# Altium PCB top.PcbDoc
Units mm, origin at the board's own origin, x right, y up, seen from the top; angles counter-clockwise.
Board outline 100.5 x 70.5 mm, 2 copper layers (Top Layer, Bottom Layer); 67 components, 51 nets, 221 pads, 12 vias.
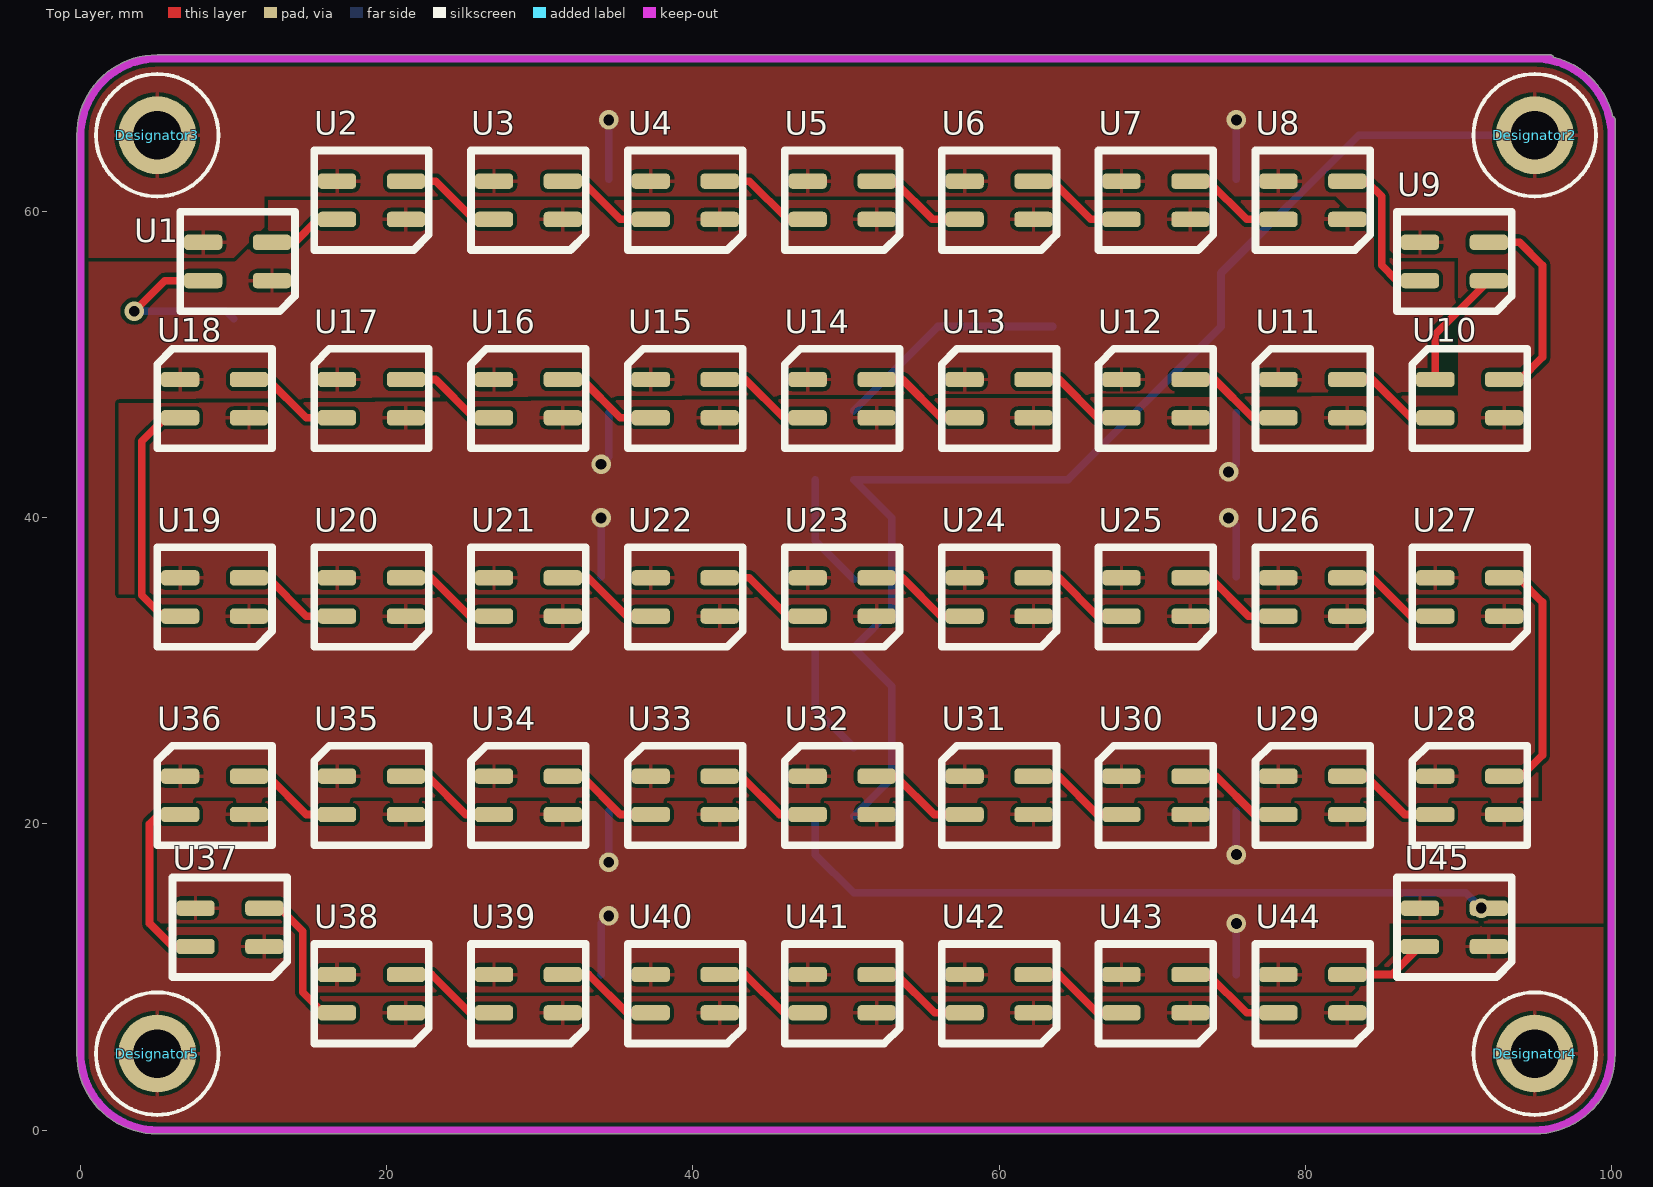
[diagram p0: Top Layer view]
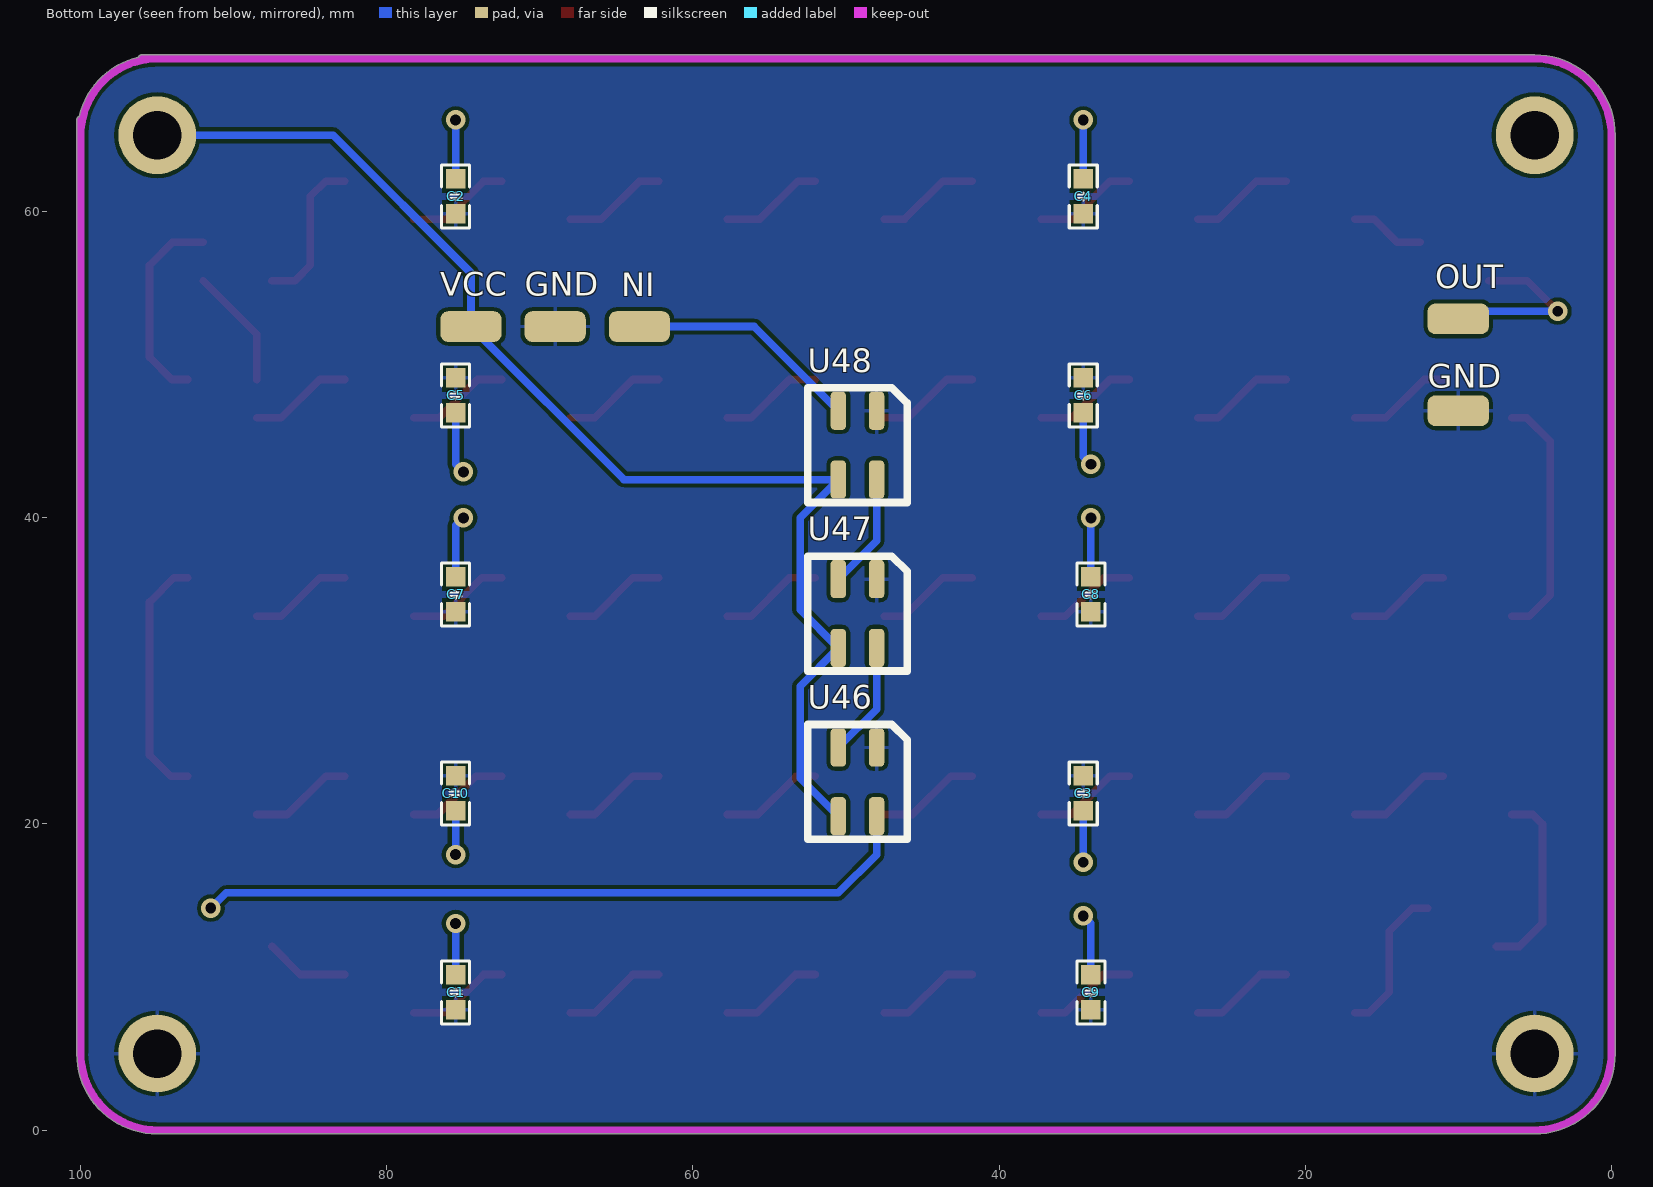
[diagram p1: Bottom Layer view, seen from below]
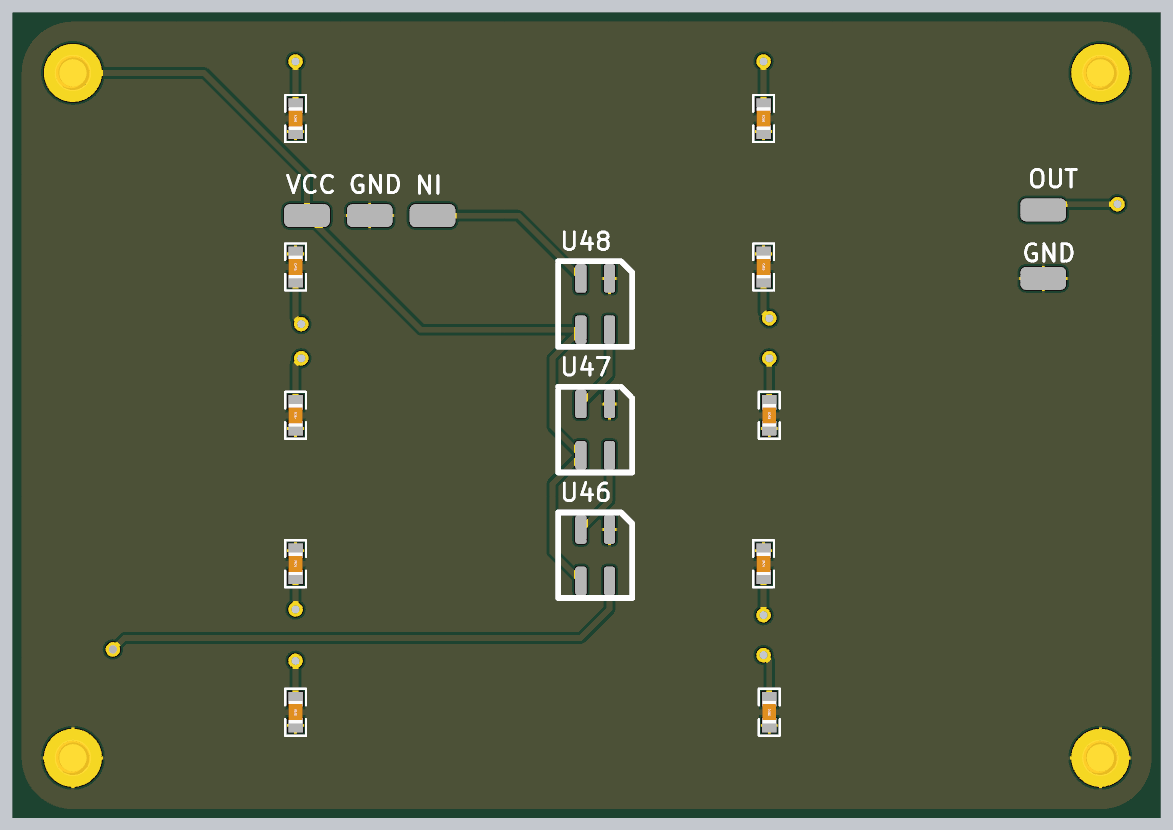
[diagram p2: 3D render of the assembled board from below, using the file's embedded part models]

## Layer stack, top to bottom
Top Solder: solder mask 0.0102, Solder Resist, Dk 3.5
Top Layer: signal copper 0.0356
Dielectric 1: dielectric 0.32, FR-4, Dk 4.8
Bottom Layer: signal copper 0.0356
Bottom Solder: solder mask 0.0102, Solder Resist, Dk 3.5

## Board outline
4.999,-0.25 cw(c5,5) -0.25,5 -0.25,65 cw(c0,65) -0.25,65.001 cw(c5,65) 5,70.25 96,70.25 cw(c96,70) 96.227,70.105 cw(c95,65) 100.105,66.227 cw(c100,66) 100.25,66 100.25,5 cw(c100,5) 100.25,4.999 ccw(c95,5) 100.25,5 100.25,4.999 cw(c95,5) 95,-0.25 5,-0.25 cw(c5,0)

## Design rules (kind name [scope] priority, off if disabled: settings)
Clearance [All] p1: gap=0.254 ignorepadtopadclearanceinfootprint=FALSE except(0: Arc-Hole Track-Hole SMDPad-Hole THPad-Hole Via-Hole Fill-Hole Poly-Hole Region-Hole Text-Hole)
PolygonConnect [All] p1: connectstyle=Relief reliefconductorwidth=0.254 reliefentries=4 polygonreliefangle="90 Angle" airgapwidth=0.254
RoutingVias [All] p1: holewidth=0.711 width=1.27 viastyle="Through Hole" minholewidth=0.711 minwidth=1.27 maxholewidth=0.711 maxwidth=1.27
SolderMaskExpansion [All] p1: expansion=0.102
Width [All] p1: maxlimit=1 minlimit=0.254 preferedwidth=0.5
30 further rules are at their usual default settings.

## Classes and differential pairs
component class 灯: C1 C2 C3 C4 C5 C6 C7 C8 C9 C10 U1 U2 U3 U4 U5 U6 U7 U8 U9 U10 U11 U12 U13 U14 U15 U16 U17 U18 U19 U20 U21 U22 U23 U24 U25 U26 U27 U28 U29 U30 U31 U32 U33 U34 U35 U36 U37 U38 U39 U40 U41 U42 U43 U44 U45 U46 U47 U48

## Components (designator, comment, footprint, x,y, rotation, side; value= is the part's Value field where it differs from the comment)
C1 "Cap" "C 0805_M" 75.5,9 r90 bottom value=104
C2 "Cap" "C 0805_M" 75.5,61 r90 bottom value=104
C3 "Cap" "C 0805_M" 34.5,22 r270 bottom value=104
C4 "Cap" "C 0805_M" 34.5,61 r90 bottom value=104
C5 "Cap" "C 0805_M" 75.5,48 r270 bottom value=104
C6 "Cap" "C 0805_M" 34.5,48 r270 bottom value=104
C7 "Cap" "C 0805_M" 75.5,35 r90 bottom value=104
C8 "Cap" "C 0805_M" 34,35 r90 bottom value=104
C9 "Cap" "C 0805_M" 34,9 r90 bottom value=104
C10 "Cap" "C 0805_M" 75.5,22 r270 bottom value=104
Designator2 "Comment" M3x10+6_L 95,65 r0 top
Designator3 "Comment" M3x10+6_L 5,65 r0 top
Designator4 "Comment" M3x10+6_L 95,5 r0 top
Designator5 "Comment" M3x10+6_L 5,5 r0 top
GND "ljq" LJQ 69,52.5 r270 bottom
GND "ljq" LJQ 10,47 r270 bottom
IN "ljq" LJQ 63.5,52.5 r270 bottom
OUT "ljq" LJQ 10,53 r90 bottom
U1 "WS2812" WS2812 8,55.5 r0 top
U2 "WS2812" WS2812 16.75,59.5 r0 top
U3 "WS2812" WS2812 27,59.5 r0 top
U4 "WS2812" WS2812 37.25,59.5 r0 top
U5 "WS2812" WS2812 47.5,59.5 r0 top
U6 "WS2812" WS2812 57.75,59.5 r0 top
U7 "WS2812" WS2812 68,59.5 r0 top
U8 "WS2812" WS2812 78.25,59.5 r0 top
U9 "WS2812" WS2812 87.5,55.5 r0 top
U10 "WS2812" WS2812 93,49.041 r180 top
U11 "WS2812" WS2812 82.75,49.041 r180 top
U12 "WS2812" WS2812 72.5,49.041 r180 top
U13 "WS2812" WS2812 62.25,49.041 r180 top
U14 "WS2812" WS2812 52,49.041 r180 top
U15 "WS2812" WS2812 41.75,49.041 r180 top
U16 "WS2812" WS2812 31.5,49.041 r180 top
U17 "WS2812" WS2812 21.25,49.041 r180 top
U18 "WS2812" WS2812 11,49.041 r180 top
U19 "WS2812" WS2812 6.5,33.582 r0 top
U20 "WS2812" WS2812 16.75,33.582 r0 top
U21 "WS2812" WS2812 27,33.582 r0 top
U22 "WS2812" WS2812 37.25,33.582 r0 top
U23 "WS2812" WS2812 47.5,33.582 r0 top
U24 "WS2812" WS2812 57.75,33.582 r0 top
U25 "WS2812" WS2812 68,33.582 r0 top
U26 "WS2812" WS2812 78.25,33.582 r0 top
U27 "WS2812" WS2812 88.5,33.582 r0 top
U28 "WS2812" WS2812 93,23.122 r180 top
U29 "WS2812" WS2812 82.75,23.122 r180 top
U30 "WS2812" WS2812 72.5,23.122 r180 top
U31 "WS2812" WS2812 62.25,23.122 r180 top
U32 "WS2812" WS2812 52,23.122 r180 top
U33 "WS2812" WS2812 41.75,23.122 r180 top
U34 "WS2812" WS2812 31.5,23.122 r180 top
U35 "WS2812" WS2812 21.25,23.122 r180 top
U36 "WS2812" WS2812 11,23.122 r180 top
U37 "WS2812" WS2812 7.5,12 r0 top
U38 "WS2812" WS2812 16.75,7.663 r0 top
U39 "WS2812" WS2812 27,7.663 r0 top
U40 "WS2812" WS2812 37.25,7.663 r0 top
U41 "WS2812" WS2812 47.5,7.663 r0 top
U42 "WS2812" WS2812 57.75,7.663 r0 top
U43 "WS2812" WS2812 68,7.663 r0 top
U44 "WS2812" WS2812 78.25,7.663 r0 top
U45 "WS2812" WS2812 87.5,12 r0 top
U46 "WS2812" WS2812 48,20.5 r90 bottom
U47 "WS2812" WS2812 48,31.5 r90 bottom
U48 "WS2812" WS2812 48,42.5 r90 bottom
VCC "ljq" LJQ 74.5,52.5 r270 bottom

## Footprints (in the part's own frame and the unit in brackets; to place one, negate y for a bottom-side part, rotate by r counter-clockwise, add the part's x,y. Pads: shape width x height; smd on the part's side, far side on the other; paste and mask are expansions set on the pad)
"C 0805_M" [mil] "无极性贴片电容"
  rect 50x50 smd: 1(-45,0) 2(45,0)
  silkscreen extent -81,-36 81,36, body extent -39,-24 39,24, height 20
LJQ [mm]
  rrect50% 2x4 smd: 1(0,0)
M3x10+6_L [mm] "M3铜柱，长：10mm，螺纹长：6mm"
  round 5.08 hole 3.175: 1(0,0)
  silkscreen extent -4,-4 4,4, body extent -2.7,-2.35 2.7,2.35, height 10.05
WS2812 [mm]
  rrect50% 2.5x1 smd: 1(0,2.5) 2(0,0) 3(4.5,0) 4(4.5,2.5)
  silkscreen extent -1.5,-2 6,4.5

## Part data
C1 C2 C3 C4 C5 C6 C7 C8 C9 C10: "Capacitor", LatestRevisionDate=17-Jul-2002, LatestRevisionNote="Re-released for DXP Platform.", PackageDescription="Radial Cap, Thru-Hole; 2 Leads; 0.3 in Pin Spacing", PackageReference=RAD-0.3, Published=8-Jun-2000, Publisher="Altium Limited"

## Via types
v1: diameter 1.27, hole 0.711, Top Layer to Bottom Layer, 12 vias

## Nets (pads, with @x,y where several pads share a name; then routed paths per layer and width w, separated by ;. In a path a pad name is that pad's centre, name@x,y a point inside that pad or via, vN(x,y) a via of type N, cw(c..) or ccw(c..) an arc to the next point about the centre after c; other vN are vias at no path point)
GND: C1.1 C2.1 C3.1 C4.1 C5.1 C6.1 C7.1 C8.1 C9.1 C10.1 Designator4.1 Designator5.1 GND.1 U1.3 U2.3 U3.3 U4.3 U5.3 U6.3 U7.3 U8.3 U9.3 U10.3 U11.3 U12.3 U13.3 U14.3 U15.3 U16.3 U17.3 U18.3 U19.3 U20.3 U21.3 U22.3 U23.3 U24.3 U25.3 U26.3 U27.3 U28.3 U29.3 U30.3 U31.3 U32.3 U33.3 U34.3 U35.3 U36.3 U37.3 U38.3 U39.3 U40.3 U41.3 U42.3 U43.3 U44.3 U45.3 U46.3 U47.3 U48.3 | length 7.9
  Top Layer w0.5: U10.3 88.5,52 U9.3
in: IN.1 U48.4 | length 15.3
  Bottom Layer w0.5: U48.4 56,52.5 IN.1
NetU1_4: U1.4 U2.2 | length 4.9
  Top Layer w0.5: U1.4 14,58 15.5,59.5 U2.2
NetU2_4: U2.4 U3.2 | length 6.8
  Top Layer w0.5: U2.4 23.185,62 25.685,59.5 U3.2
NetU3_4: U3.4 U4.2 | length 6.8
  Top Layer w0.5: U3.4 32.756,62 35.256,59.5 U4.2
NetU4_4: U4.4 U5.2 | length 6.8
  Top Layer w0.5: U4.4 43.683,62 46.183,59.5 U5.2
NetU5_4: U5.4 U6.2 | length 6.8
  Top Layer w0.5: U5.4 53.151,62 55.651,59.5 U6.2
NetU6_4: U6.4 U7.2 | length 6.8
  Top Layer w0.5: U6.4 63.49,62 65.99,59.5 U7.2
NetU7_4: U7.4 U8.2 | length 6.8
  Top Layer w0.5: U7.4 73.68,62 76.18,59.5 U8.2
NetU8_4: U8.4 U9.2 | length 10.1
  Top Layer w0.5: U8.4 84,62 85,61 85,56.5 86,55.5 U9.2
NetU9_4: U9.4 U10.2 | length 13.2
  Top Layer w0.5: U9.4 94,58 95.5,56.5 95.5,50.5 94.041,49.041 U10.2
NetU10_4: U10.4 U11.2 | length 6.8
  Top Layer w0.5: U11.2 84.388,49.041 86.888,46.541 U10.4
NetU11_4: U11.4 U12.2 | length 6.8
  Top Layer w0.5: U12.2 74.076,49.041 76.576,46.541 U11.4
NetU12_4: U12.4 U13.2 | length 6.8
  Top Layer w0.5: U13.2 63.926,49.041 66.426,46.541 U12.4
NetU13_4: U13.4 U14.2 | length 6.8
  Top Layer w0.5: U14.2 53.69,49.041 56.19,46.541 U13.4
NetU14_4: U14.4 U15.2 | length 6.8
  Top Layer w0.5: U15.2 43.429,49.041 45.929,46.541 U14.4
NetU15_4: U15.4 U16.2 | length 6.8
  Top Layer w0.5: U16.2 32.75,49.041 35.25,46.541 U15.4
NetU16_4: U16.4 U17.2 | length 6.8
  Top Layer w0.5: U17.2 23.185,49.041 25.685,46.541 U16.4
NetU17_4: U17.4 U18.2 | length 6.8
  Top Layer w0.5: U18.2 12.227,49.041 14.727,46.541 U17.4
NetU18_4: U18.4 U19.2 | length 16.3
  Top Layer w0.5: U19.2 5.354,33.582 4,34.936 4,45 5.541,46.541 U18.4
NetU19_4: U19.4 U20.2 | length 6.8
  Top Layer w0.5: U19.4 12.247,36.082 14.747,33.582 U20.2
NetU20_4: U20.4 U21.2 | length 6.8
  Top Layer w0.5: U20.4 22.91,36.082 25.41,33.582 U21.2
NetU21_4: U21.4 U22.2 | length 6.8
  Top Layer w0.5: U21.4 33.172,36.082 35.672,33.582 U22.2
NetU22_4: U22.4 U23.2 | length 6.8
  Top Layer w0.5: U22.4 43.683,36.082 46.183,33.582 U23.2
NetU23_4: U23.4 U24.2 | length 6.8
  Top Layer w0.5: U23.4 53.69,36.082 56.19,33.582 U24.2
NetU24_4: U24.4 U25.2 | length 6.8
  Top Layer w0.5: U24.4 63.926,36.082 66.426,33.582 U25.2
NetU25_4: U25.4 U26.2 | length 6.8
  Top Layer w0.5: U25.4 73.796,36.082 76.296,33.582 U26.2
NetU26_4: U26.4 U27.2 | length 6.8
  Top Layer w0.5: U26.4 84.388,36.082 86.888,33.582 U27.2
NetU27_4: U27.4 U28.2 | length 16.2
  Top Layer w0.5: U28.2 94.122,23.122 95.5,24.5 95.5,34.5 93.918,36.082 U27.4
NetU28_4: U28.4 U29.2 | length 6.8
  Top Layer w0.5: U29.2 83.997,23.122 86.497,20.622 U28.4
NetU29_4: U29.4 U30.2 | length 6.8
  Top Layer w0.5: U30.2 74.188,23.122 76.688,20.622 U29.4
NetU30_4: U30.4 U31.2 | length 6.8
  Top Layer w0.5: U31.2 63.926,23.122 66.426,20.622 U30.4
NetU31_4: U31.4 U32.2 | length 6.8
  Top Layer w0.5: U32.2 53.263,23.122 55.763,20.622 U31.4
NetU32_4: U32.4 U33.2 | length 6.8
  Top Layer w0.5: U33.2 43.159,23.122 45.659,20.622 U32.4
NetU33_4: U33.4 U34.2 | length 6.8
  Top Layer w0.5: U34.2 32.765,23.122 35.265,20.622 U33.4
NetU34_4: U34.4 U35.2 | length 6.8
  Top Layer w0.5: U35.2 22.661,23.122 25.161,20.622 U34.4
NetU35_4: U35.4 U36.2 | length 6.8
  Top Layer w0.5: U36.2 12.242,23.122 14.742,20.622 U35.4
NetU36_4: U36.4 U37.2 | length 12.4
  Top Layer w0.5: U36.4 5.122,20.622 4.5,20 4.5,13.5 6,12 U37.2
NetU37_4: U37.4 U38.2 | length 9.9
  Top Layer w0.5: U37.4 13,14.5 14.5,13 14.5,9 15.837,7.663 U38.2
NetU38_4: U38.4 U39.2 | length 6.8
  Top Layer w0.5: U38.4 22.931,10.163 25.431,7.663 U39.2
NetU39_4: U39.4 U40.2 | length 6.8
  Top Layer w0.5: U39.4 33.192,10.163 35.692,7.663 U40.2
NetU40_4: U40.4 U41.2 | length 6.8
  Top Layer w0.5: U40.4 43.429,10.163 45.929,7.663 U41.2
NetU41_4: U41.4 U42.2 | length 6.8
  Top Layer w0.5: U41.4 53.298,10.163 55.798,7.663 U42.2
NetU42_4: U42.4 U43.2 | length 6.8
  Top Layer w0.5: U42.4 63.926,10.163 66.426,7.663 U43.2
NetU43_4: U43.4 U44.2 | length 6.8
  Top Layer w0.5: U43.4 73.68,10.163 76.18,7.663 U44.2
NetU44_4: U44.4 U45.2 | length 5.5
  Top Layer w0.5: U44.4 85.663,10.163 U45.2
NetU45_4: U45.4 U46.2 | length 47.4
  Bottom Layer w0.5: U46.2 48,18 50.5,15.5 90.5,15.5 v1(91.5,14.5)
NetU46_4: U46.4 U47.2 | length 7.5
  Bottom Layer w0.5: U47.2 48,27.5 U46.4
NetU47_4: U47.4 U48.2 | length 7.5
  Bottom Layer w0.5: U48.2 48,38.5 U47.4
out: OUT.1 U1.2 | length 12
  Top Layer w0.5: v1(3.5,53.5) 5.5,55.5 U1.2
  Bottom Layer w0.5: v1(3.5,53.5) 9.5,53.5 OUT.1
VCC: C1.2 C2.2 C3.2 C4.2 C5.2 C6.2 C7.2 C8.2 C9.2 C10.2 Designator2.1 Designator3.1 U1.1 U2.1 U3.1 U4.1 U5.1 U6.1 U7.1 U8.1 U9.1 U10.1 U11.1 U12.1 U13.1 U14.1 U15.1 U16.1 U17.1 U18.1 U19.1 U20.1 U21.1 U22.1 U23.1 U24.1 U25.1 U26.1 U27.1 U28.1 U29.1 U30.1 U31.1 U32.1 U33.1 U34.1 U35.1 U36.1 U37.1 U38.1 U39.1 U40.1 U41.1 U42.1 U43.1 U44.1 U45.1 U46.1 U47.1 U48.1 VCC.1 | length 118.9
  Bottom Layer w0.5: C9.2 34,13.5 v1(34.5,14) ; C8.2 v1(34,40) ; v1(34,43.5) 34.5,44 C6.2 ; v1(34.5,17.5) C3.2 ; C4.2 v1(34.5,66) ; U46.1 53,23 53,29 U47.1 53,34 53,40 U48.1 64.5,42.5 VCC.1 74.5,56 83.5,65 Designator2.1 ; v1(75,40) 75.5,39.5 C7.2 ; v1(75,43) 75.5,43.5 C5.2 ; C1.2 v1(75.5,13.5) ; v1(75.5,18) C10.2 ; C2.2 v1(75.5,66)

## Polygon pours and split planes (outlines as drawn)
VCC on Top Layer "Top Layer-No Net" (solid, remove dead copper, pour order 6): -3,57 10,57 12,59 12,61 82,61 86,57 90,57 90,74 89,73 -3,73
VCC on Top Layer "Top Layer-No Net" (solid, remove dead copper, pour order 8): 2.5,47.5 2.5,35 105,35 105,47.5 104,48.5 104,75.5 90.5,75.5 88.5,73.5 90,72 90,48.006
VCC on Top Layer "Top Layer-No Net" (solid, remove dead copper, pour order 10): 5.5,21.5 95.5,21.5 95.5,37 101,37 101,13.5 85.5,13.5 85.5,11.5 83,9 15.5,9 14.5,12.5
VCC on Top Layer "Top Layer-No Net" (solid, remove dead copper, pour order 12): 4.5,21.5 4.5,13.5 14,13.5 17,16.5 13.138,20.362 13.138,21.5
GND on Top Layer "Top Layer-No Net" (solid, remove dead copper, pour order 14): -8,75 -8,-17.5 -5,-14.5 114,-14.5 114,62 97.5,78.5
GND on Bottom Layer "Top Layer-No Net" (solid, remove dead copper, pour order 18): 103.5,74 103.5,-6.5 104,-7 -8.5,-7 -8.5,74 -6.5,76

## Keep-outs
Keep-Out Layer:
  lines w0.5: 95,70 cw(c95,65) 100,65 ; 96,70 5,70 ccw(c5,65) 0,65 0,5 ccw(c5,5) 5,0 95,0 ccw(c95,5) 100,5 100,66

## Silkscreen, mask and mechanical layers (free items; w line width, h text height)
Mechanical 1:
  lines w0.5: 0,5 ccw(c5,5) 5,0 95,0 ccw(c95,5) 100,5 100,65 ccw(c95,65) 95,70 5,70 ccw(c5,65) 0,65 0,5